# EAGLE board L3G4200D_Breakout (EAGLE 5.10)
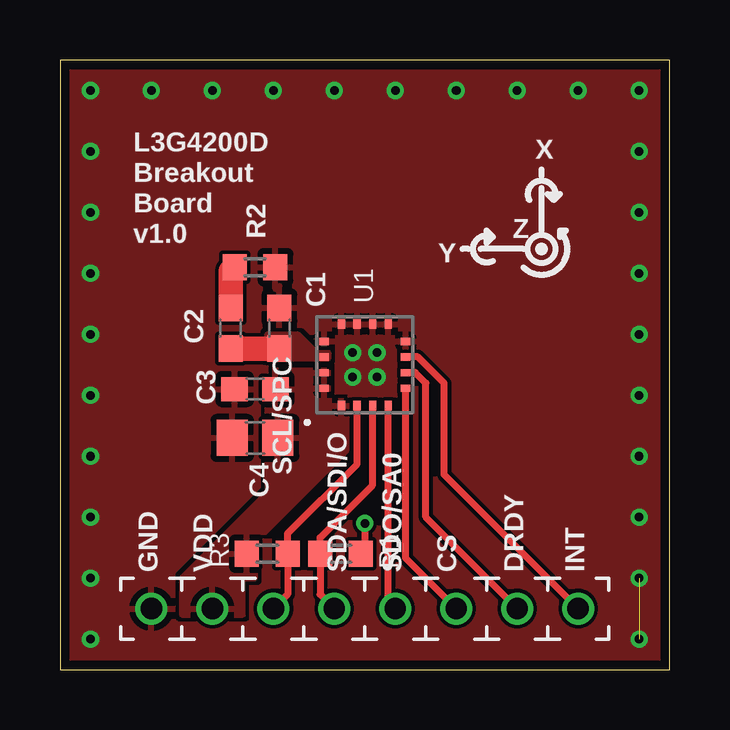
[diagram p0: board, top side]
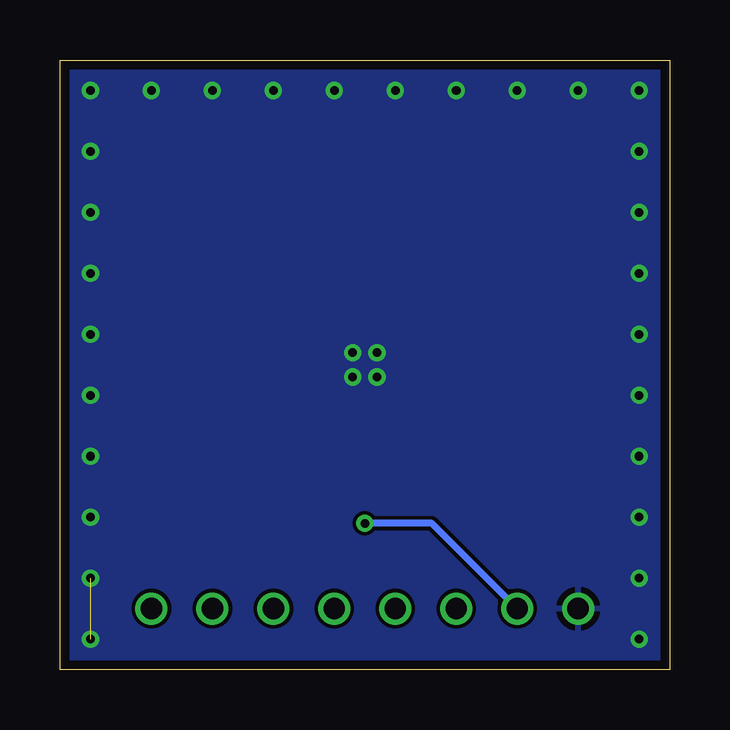
[diagram p1: board, bottom side, seen from below]

Size 25.4 x 25.4 mm. Coordinates in mm from the lower left corner, seen from the top.
Outline: 0,0 25.4,0 25.4,25.4 0,25.39 0,0
Copper layers (1*16): Top 0.0356mm / dielectric 1.5011mm / Bottom 0.0356mm
Design rules "LaenPCBOrder": minimum track width 6mil, minimum drill 13mil, track to track 6mil, track to pad 6mil, pad to pad 6mil, via to via 6mil, smd to smd 6mil, copper to edge 15mil, drill to drill 6mil, minimum pad ring 7mil, minimum via ring 7mil, stop-mask expansion 4mil, vias tented up to drill 0mil, thermal gap 10mil

## Footprints (pad centres in the part's own frame; a part is rotated, then mirrored left to right if it is on the bottom)
C0603 = smd 1.1 x 1: 1 -0.85,0; 2 0.85,0
C0805 = smd 1.3 x 1.5: 1 -0.95,0; 2 0.95,0
JUMPPAD = drill 0.889 round: PAD 0,0
R0603 = smd 1 x 1.1: 1 -0.85,0; 2 0.85,0
LGA-16L(4X4X1.1) = smd 0.4 x 0.3: 1 -1.7,0.975; 2 -1.7,0.325; 3 -1.7,-0.325; 4 -1.7,-0.975; 9 1.7,-0.975; 10 1.7,-0.325; 11 1.7,0.325; 12 1.7,0.975 | smd 0.3 x 0.4: 5 -0.975,-1.7; 6 -0.325,-1.7; 7 0.325,-1.7; 8 0.975,-1.7; 13 0.975,1.7; 14 0.325,1.7; 15 -0.325,1.7; 16 -0.975,1.7

## Placement (x,y rotation side)
C1  10n  [C0603]  9.14,14.22 90 top
C2  470p  [C0603]  7.11,14.22 90 top
C3  0.1u  [C0603]  8.13,11.68 0 top
C4  10u  [C0805]  8.13,9.65 0 top
CS  JUMPPAD  [JUMPPAD]  16.51,2.54 0 top
DRDY  JUMPPAD  [JUMPPAD]  19.05,2.54 0 top
GND  JUMPPAD  [JUMPPAD]  3.81,2.54 0 top
INT  JUMPPAD  [JUMPPAD]  21.59,2.54 0 top
R1  10k  [R0603]  11.68,4.83 0 top
R2  10k  [R0603]  8.13,16.76 180 top
R3  10k  [R0603]  8.64,4.83 180 top
SCL/SPC  JUMPPAD  [JUMPPAD]  8.89,2.54 0 top
SDA/SDI/O  JUMPPAD  [JUMPPAD]  11.43,2.54 0 top
SDO/SA0  JUMPPAD  [JUMPPAD]  13.97,2.54 0 top
U1  L3G4200D  [LGA-16L(4X4X1.1)]  12.7,12.7 90 top
VDD  JUMPPAD  [JUMPPAD]  6.35,2.54 0 top

## Library data of the parts
C1-C4 R1-R3 = rcl
CS DRDY GND INT SCL/SPC SDA/SDI/O SDO/SA0 U1 VDD = Compass

## Nets
CS: CS.PAD U1.5
DRDY: DRDY.PAD U1.6
GND: C1.2 C3.1 C4.1 GND.PAD R2.1 U1.8 U1.9 U1.10 U1.11 U1.12 U1.13
INT: INT.PAD U1.7
N$5: C2.2 R2.2
PLLFILT: C1.1 C2.1 U1.14
SCL/SPC: R3.1 SCL/SPC.PAD U1.2
SDA/SDI/SDO: R1.1 SDA/SDI/O.PAD U1.3
SDO/SA0: SDO/SA0.PAD U1.4
VDD: C3.2 C4.2 R1.2 R3.2 U1.1 U1.15 U1.16 VDD.PAD

## Tracks (layer width: path | path; a pad name or v marks a point on that pad's centre or on a via)
CS
  Top 0.3: U1.5 14.4,4.65 CS.PAD
DRDY
  Top 0.3: U1.6 14.8,12.38 15.24,11.94 15.24,6.35 DRDY.PAD
GND  (via drill 0.36)  (1 unrouted)
  other vias: 12.19,13.21 13.21,13.21 12.19,12.19 13.21,12.19 1.27,1.27 1.27,3.81 1.27,6.35 1.27,8.89 1.27,11.43 1.27,13.97 1.27,16.51 1.27,19.05 1.27,21.59 1.27,24.13 3.81,24.13 6.35,24.13 8.89,24.13 11.43,24.13 13.97,24.13 16.51,24.13 19.05,24.13 21.59,24.13 24.13,24.13 24.13,21.59 24.13,19.05 24.13,16.51 24.13,13.97 24.13,11.43 24.13,8.89 24.13,6.35 24.13,3.81 24.13,1.27
  pour Top (rank 6): 0,25.4 25.4,25.4 25.4,0 0,0
  pour Bottom (rank 6): 0,25.4 25.4,25.4 25.4,0 0,0
INT
  Top 0.3: U1.7 14.91,13.03 16,11.94 16,8.13 INT.PAD
N$5
  Top 1.016: C2.2 7.11,16.6 R2.2
PLLFILT
  Top 1.016: C2.1 C1.1
  pour Top (no thermals): 11.18,12.95 8.64,12.95 8.64,13.97 9.91,13.97 10.67,13.21 11.18,13.21
SCL/SPC
  Top 0.3: SCL/SPC.PAD 9.49,3.14 R3.1 9.49,5.68 12.38,8.56 U1.2
SDA/SDI/SDO
  Top 0.3: SDA/SDI/O.PAD 10.83,3.14 R1.1 10.83,5.5 13.03,7.69 U1.3
SDO/SA0
  Top 0.3: U1.4 13.68,2.83 SDO/SA0.PAD
VDD  (via drill 0.36)
  Top 0.3: R1.2 12.7,4.99 v12.7,6.1
  Bottom 0.3: v12.7,6.1 9.91,6.1 VDD.PAD
  pour Top: 11.18,12.45 8.64,12.45 8.64,7.37 5.08,3.81 5.08,2.29 7.62,2.29 7.62,3.81 8.13,3.81 8.13,5.33 11.94,9.14 11.94,11.18 11.18,11.18

## Text on the board
tPlace: L3G4200D | X | Breakout | Board | Z | v1.0 | Y